# Altium PCB ring_rx_v3_controller.PcbDoc (part 1 of 2)
Units mil, origin at the board's own origin, x right, y up, seen from the top; angles counter-clockwise.
Board outline 1259.38 x 1096.3 mil, 2 copper layers (L1, L2), stack 62.8 mil thick; 124 components, 78 nets, 365 pads, 144 vias.
Unrouted connection lines stored in the file: 28.
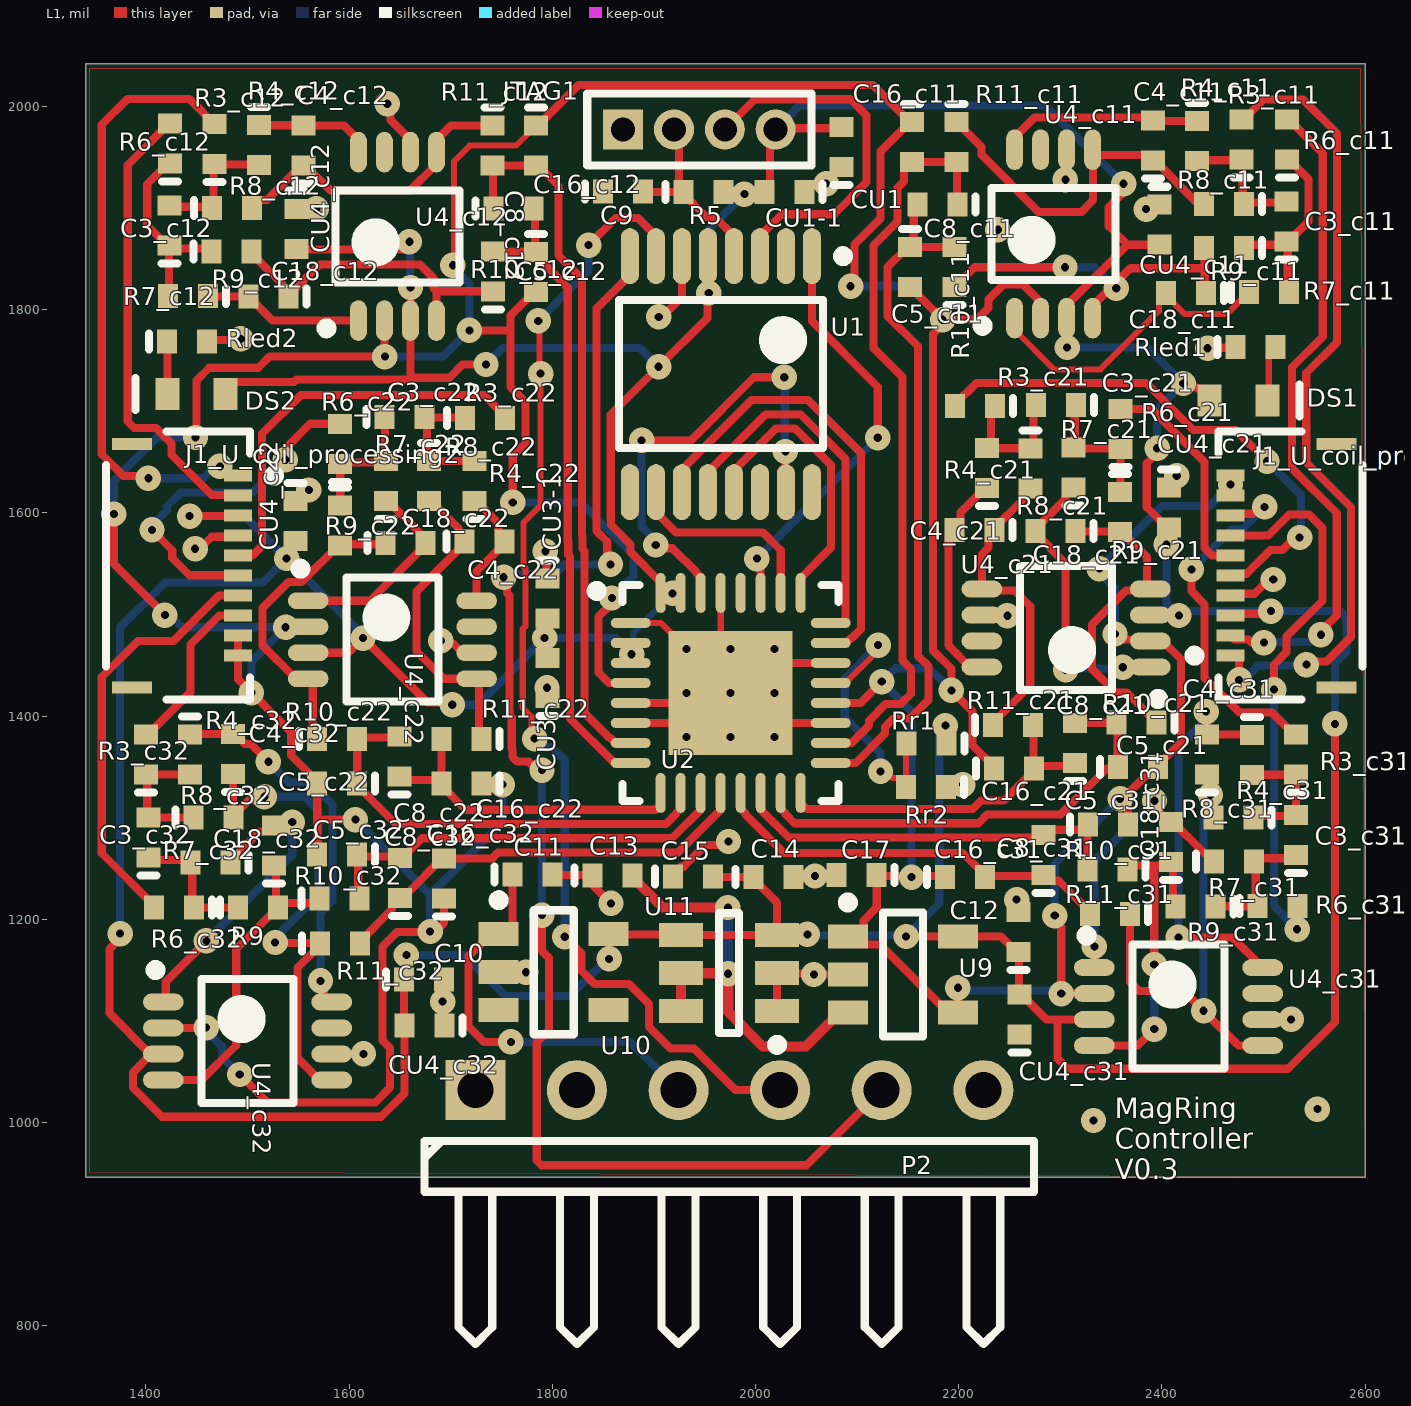
[diagram p0: L1 view]
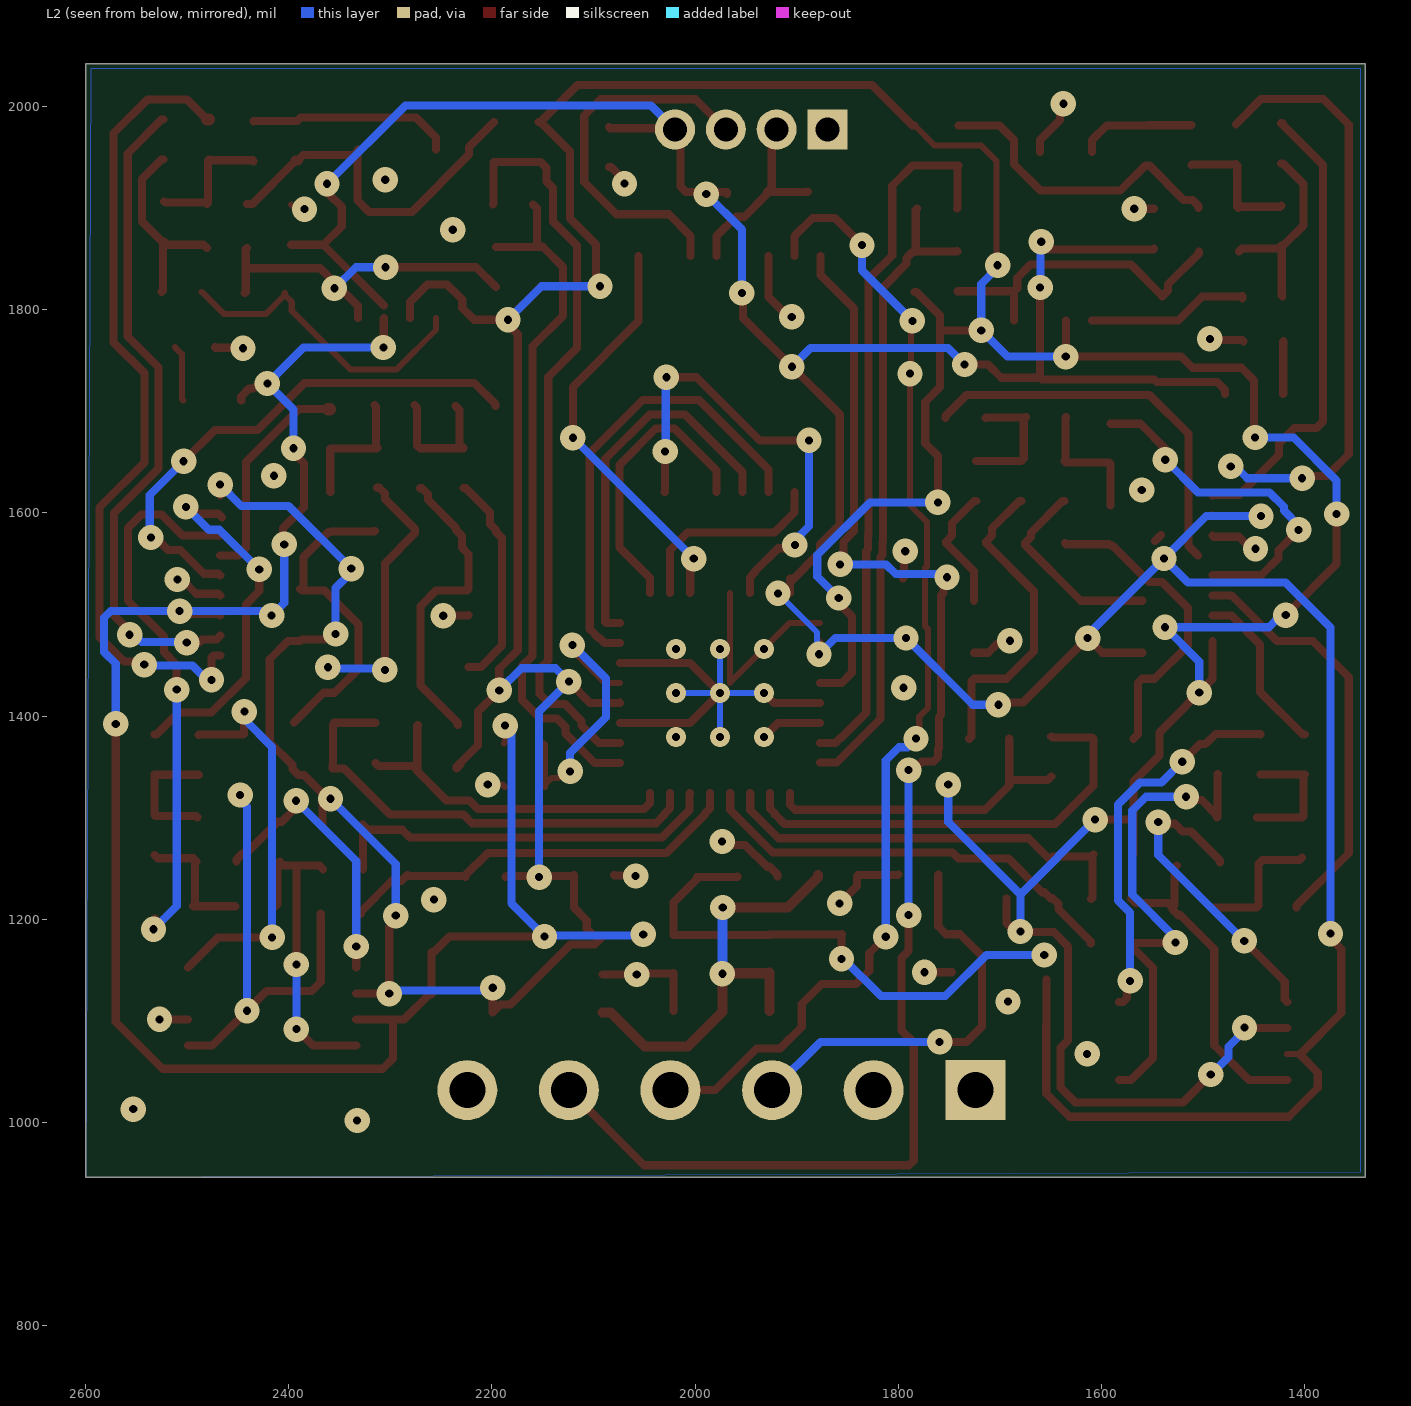
[diagram p1: L2 view, seen from below]

## Layer stack, top to bottom
Top Solder: solder mask 0.1, Solder Resist, Dk 0
L1: signal copper 1.4
Core: dielectric 60, FR-4, Dk 4.6
L2: signal copper 1.4
Bottom Solder: solder mask 0.1, Solder Resist, Dk 0

## Board outline
1340.62,946 2600,946 2600,2042.3 1340.62,2042.3

## Design rules (kind name [scope] priority, off if disabled: settings)
AssemblyTestPointUsage [All] p0: scope1count=1 scope1_0_kind=Board scope1_0_value=Board scope2count=1 scope2_0_kind=Board scope2_0_value=Board commentlength=0
AssemblyTestpoint [All] p0: scope1count=1 scope1_0_kind=Board scope1_0_value=Board scope2count=1 scope2_0_kind=Board scope2_0_value=Board commentlength=0
Clearance "Clearance~Sunstone Circuits" [All] p0: scope1count=1 scope1_0_kind=Board scope1_0_value=Board scope2count=1 scope2_0_kind=Board scope2_0_value=Board commentlength=56 gap=6 // Sunstone Circuits Minimum Clearance Rule (Double Sided)
Clearance "Clearance~Sunstone Circuits" [All] p1: gap=6 ignorepadtopadclearanceinfootprint=FALSE except(0: Arc-Hole Track-Hole SMDPad-Hole THPad-Hole Via-Hole Fill-Hole Poly-Hole Region-Hole Text-Hole) // Sunstone Circuits Minimum Clearance Rule (Double Sided)
ComponentClearance [All] p0: scope1count=1 scope1_0_kind=Board scope1_0_value=Board scope2count=1 scope2_0_kind=Board scope2_0_value=Board commentlength=0 gap=10 collisioncheckmode=3
DiffPairsRouting [All] p0: scope1count=1 scope1_0_kind=Board scope1_0_value=Board scope2count=1 scope2_0_kind=Board scope2_0_value=Board commentlength=0
FabricationTestPointUsage [All] p0: scope1count=1 scope1_0_kind=Board scope1_0_value=Board scope2count=1 scope2_0_kind=Board scope2_0_value=Board commentlength=0 valid=0 allowmultiple=FALSE
FabricationTestpoint [All] p0: scope1count=1 scope1_0_kind=Board scope1_0_value=Board scope2count=1 scope2_0_kind=Board scope2_0_value=Board commentlength=0 side=3 testpointundercomponent=TRUE minsize=40 maxsize=100 preferedsize=60 minholesize=0 maxholesize=40 preferedholesize=32 testpointgrid=1
FanoutControl Fanout_Default [All] p0: scope1count=1 scope1_0_kind=Board scope1_0_value=Board scope2count=1 scope2_0_kind=Board scope2_0_value=Board commentlength=30 // Fanout_Default (Default Rule)
FanoutControl Fanout_Small [All] p0 off: scope1count=1 scope1_0_kind=Board scope1_0_value=Board scope2count=1 scope2_0_kind=Board scope2_0_value=Board commentlength=84 // Protel DXP Scope 1 Expression Was: (CompPinCount < 5)   Fanout_Small (Default Rule)
FanoutControl Fanout_SOIC [All] p0 off: scope1count=1 scope1_0_kind=Board scope1_0_value=Board scope2count=1 scope2_0_kind=Board scope2_0_value=Board commentlength=71 // Protel DXP Scope 1 Expression Was: IsSOIC   Fanout_SOIC (Default Rule)
FanoutControl Fanout_LCC [All] p0 off: scope1count=1 scope1_0_kind=Board scope1_0_value=Board scope2count=1 scope2_0_kind=Board scope2_0_value=Board commentlength=69 // Protel DXP Scope 1 Expression Was: IsLCC   Fanout_LCC (Default Rule)
FanoutControl Fanout_BGA [All] p0 off: scope1count=1 scope1_0_kind=Board scope1_0_value=Board scope2count=1 scope2_0_kind=Board scope2_0_value=Board commentlength=69 // Protel DXP Scope 1 Expression Was: IsBGA   Fanout_BGA (Default Rule)
Height [All] p0: scope1count=1 scope1_0_kind=Board scope1_0_value=Board scope2count=1 scope2_0_kind=Board scope2_0_value=Board commentlength=0
HoleSize TestPointUsage [All] p0: scope1count=1 scope1_0_kind=Board scope1_0_value=Board scope2count=1 scope2_0_kind=Board scope2_0_value=Board commentlength=0 absolutevalues=TRUE maxlimit=100 minlimit=1 maxpercent=80.000 minpercent=20.000
HoleSize Testpoint [All] p0: scope1count=1 scope1_0_kind=Board scope1_0_value=Board scope2count=1 scope2_0_kind=Board scope2_0_value=Board commentlength=0 absolutevalues=TRUE maxlimit=100 minlimit=1 maxpercent=80.000 minpercent=20.000
HoleSize "HoleSize~Sunstone Circuits" [All] p0: scope1count=1 scope1_0_kind=Board scope1_0_value=Board scope2count=1 scope2_0_kind=Board scope2_0_value=Board commentlength=60 absolutevalues=TRUE maxlimit=251 minlimit=8 maxpercent=80.000 minpercent=20.000 // SSC Hole Size Rule For Single Sided & Double Sided Designs.
HoleSize "HoleSize~Sunstone Circuits" [All] p1: absolutevalues=TRUE maxlimit=251 minlimit=8 maxpercent=80.000 minpercent=20.000 // SSC Hole Size Rule For Single Sided & Double Sided Designs.
HoleSize Testpoint [All] p2: absolutevalues=TRUE maxlimit=100 minlimit=1 maxpercent=80.000 minpercent=20.000
HoleSize TestPointUsage [All] p3: absolutevalues=TRUE maxlimit=100 minlimit=1 maxpercent=80.000 minpercent=20.000
HoleToHoleClearance [All] p0: scope1count=1 scope1_0_kind=Board scope1_0_value=Board scope2count=1 scope2_0_kind=Board scope2_0_value=Board commentlength=0
LayerPairs [All] p0: scope1count=1 scope1_0_kind=Board scope1_0_value=Board scope2count=1 scope2_0_kind=Board scope2_0_value=Board commentlength=0 enforce=TRUE
MinimumAnnularRing "MinimumAnnularRing~Sunstone Circuits" [All] p0: scope1count=1 scope1_0_kind=Board scope1_0_value=Board scope2count=1 scope2_0_kind=Board scope2_0_value=Board commentlength=54 minimumring=7 // Sunstone Circuits Minimum Annular Ring (Double Sided)
MinimumAnnularRing "MinimumAnnularRing~Sunstone Circuits" [All] p1: minimumring=7 // Sunstone Circuits Minimum Annular Ring (Double Sided)
MinimumSolderMaskSliver [All] p0: scope1count=1 scope1_0_kind=Board scope1_0_value=Board scope2count=1 scope2_0_kind=Board scope2_0_value=Board commentlength=0
MinimumSolderMaskSliver [All] p1: minsoldermaskwidth=4
NetAntennae [All] p0: scope1count=1 scope1_0_kind=Board scope1_0_value=Board scope2count=1 scope2_0_kind=Board scope2_0_value=Board commentlength=0
PasteMaskExpansion [All] p0: scope1count=1 scope1_0_kind=Board scope1_0_value=Board scope2count=1 scope2_0_kind=Board scope2_0_value=Board commentlength=0 expansion=0
PlaneClearance "PlaneClearance~Sunstone Circuits" [All] p0: scope1count=1 scope1_0_kind=Board scope1_0_value=Board scope2count=1 scope2_0_kind=Board scope2_0_value=Board commentlength=60 clearance=12 // Sunstone Circuits Power Plane Clearance Rule (Double Sided)
PlaneClearance "PlaneClearance~Sunstone Circuits" [All] p1: clearance=12 // Sunstone Circuits Power Plane Clearance Rule (Double Sided)
PlaneConnect "PlaneConnect~Sunstone Circuits" [All] p0: scope1count=1 scope1_0_kind=Board scope1_0_value=Board scope2count=1 scope2_0_kind=Board scope2_0_value=Board commentlength=58 planeconnectstyle=Relief reliefexpansion=10 reliefentries=4 reliefconductorwidth=8 reliefairgap=10 // Sunstone Circuits Power Plane Connect Rule (Double Sided)
PlaneConnect "PlaneConnect~Sunstone Circuits" [All] p1: planeconnectstyle=Relief reliefexpansion=10 reliefentries=4 reliefconductorwidth=8 reliefairgap=10 // Sunstone Circuits Power Plane Connect Rule (Double Sided)
PolygonConnect "PolygonConnect~Sunstone Circuits" [All] p0: scope1count=1 scope1_0_kind=Board scope1_0_value=Board scope2count=1 scope2_0_kind=Board scope2_0_value=Board commentlength=55 connectstyle=Relief reliefconductorwidth=8 reliefentries=4 polygonreliefangle="90 Angle" // Sunstone Circuits Polygon Connect Style (Double Sided)
PolygonConnect "PolygonConnect~Sunstone Circuits" [All] p1: connectstyle=Relief reliefconductorwidth=8 reliefentries=4 polygonreliefangle="90 Angle" airgapwidth=10 // Sunstone Circuits Polygon Connect Style (Double Sided)
RoomDefinition c11 [All] p0: scope1count=1 scope1_0_kind=ComponentClass scope1_0_value=c11 scope2count=1 scope2_0_kind=Board scope2_0_value=Board commentlength=0 region_x1=21112600 region_y1=17402563 region_x2=25454400 region_y2=20072600 confinementstyle=ConfineIn
RoomDefinition c32 [All] p0: scope1count=1 scope1_0_kind=ComponentClass scope1_0_value=c32 scope2count=1 scope2_0_kind=Board scope2_0_value=Board commentlength=0 region_x1=13534600 region_y1=9807700 region_x2=17539700 region_y2=14249900 confinementstyle=ConfineIn
RoomDefinition c31 [All] p0: scope1count=1 scope1_0_kind=ComponentClass scope1_0_value=c31 scope2count=1 scope2_0_kind=Board scope2_0_value=Board commentlength=0 region_x1=21646500 region_y1=10193300 region_x2=25558700 region_y2=14052400 confinementstyle=ConfineIn
RoomDefinition c22 [All] p0: scope1count=1 scope1_0_kind=ComponentClass scope1_0_value=c22 scope2count=1 scope2_0_kind=Board scope2_0_value=Board commentlength=0 region_x1=14981200 region_y1=13113399 region_x2=17802900 region_y2=17173399 confinementstyle=ConfineIn
RoomDefinition c21 [All] p0: scope1count=1 scope1_0_kind=ComponentClass scope1_0_value=c21 scope2count=1 scope2_0_kind=Board scope2_0_value=Board commentlength=0 region_x1=21679100 region_y1=13141200 region_x2=24385951 region_y2=17281200 confinementstyle=ConfineIn
RoomDefinition c12 [All] p0: scope1count=1 scope1_0_kind=ComponentClass scope1_0_value=c12 scope2count=1 scope2_0_kind=Board scope2_0_value=Board commentlength=0 region_x1=14001500 region_y1=17332000 region_x2=18061500 region_y2=20042000 confinementstyle=ConfineIn
RoomDefinition c11 [InComponentClass('c11')] p1: confinementstyle=ConfineIn formatcopy=TRUE lockcomponents=FALSE outline 2111.26,1740.26 2545.44,1740.26 2545.44,2007.26 2111.26,2007.26
RoomDefinition c32 [InComponentClass('c32')] p2: confinementstyle=ConfineIn formatcopy=TRUE lockcomponents=FALSE outline 1353.46,980.77 1753.97,980.77 1753.97,1424.99 1353.46,1424.99
RoomDefinition c31 [InComponentClass('c31')] p3: confinementstyle=ConfineIn formatcopy=TRUE lockcomponents=FALSE outline 2164.65,1019.33 2555.87,1019.33 2555.87,1405.24 2164.65,1405.24
RoomDefinition c22 [InComponentClass('c22')] p4: confinementstyle=ConfineIn formatcopy=TRUE lockcomponents=FALSE outline 1498.12,1717.34 1498.12,1311.34 1780.29,1311.34 1780.29,1717.34
RoomDefinition c21 [InComponentClass('c21')] p5: confinementstyle=ConfineIn formatcopy=TRUE lockcomponents=FALSE outline 2438.6,1314.12 2438.6,1728.12 2167.91,1728.12 2167.91,1314.12
RoomDefinition c12 [InComponentClass('c12')] p6: confinementstyle=ConfineIn formatcopy=TRUE lockcomponents=FALSE outline 1400.15,1733.2 1806.15,1733.2 1806.15,2004.2 1400.15,2004.2
RoutingCorners [All] p0: scope1count=1 scope1_0_kind=Board scope1_0_value=Board scope2count=1 scope2_0_kind=Board scope2_0_value=Board commentlength=0 cornerstyle=45-Degree minsetback=100 maxsetback=100
RoutingLayers [All] p0: scope1count=1 scope1_0_kind=Board scope1_0_value=Board scope2count=1 scope2_0_kind=Board scope2_0_value=Board commentlength=0 top layer=Automatic bottom layer=Automatic
RoutingPriority [All] p0: scope1count=1 scope1_0_kind=Board scope1_0_value=Board scope2count=1 scope2_0_kind=Board scope2_0_value=Board commentlength=0
RoutingTopology [All] p0: scope1count=1 scope1_0_kind=Board scope1_0_value=Board scope2count=1 scope2_0_kind=Board scope2_0_value=Board commentlength=0 topology=Shortest
RoutingVias "RoutingVias~Sunstone Circuits" [All] p0: scope1count=1 scope1_0_kind=Board scope1_0_value=Board scope2count=1 scope2_0_kind=Board scope2_0_value=Board commentlength=51 holewidth=8 width=25 viastyle="Through Hole" minholewidth=8 minwidth=25 maxholewidth=20 maxwidth=40 // Sunstone Circuits Routing Vias Rule (Double Sided)
RoutingVias "RoutingVias~Sunstone Circuits" [All] p1: holewidth=8 width=25 viastyle="Through Hole" minholewidth=8 minwidth=25 maxholewidth=20 maxwidth=40 // Sunstone Circuits Routing Vias Rule (Double Sided)
ShortCircuit "ShortCircuit~Sunstone Circuits" [All] p0: scope1count=1 scope1_0_kind=Board scope1_0_value=Board scope2count=1 scope2_0_kind=Board scope2_0_value=Board commentlength=65 allowed=FALSE // Sunstone Circuits Short Circuit Rule~Do Not Allow (Double Sided)
ShortCircuit "ShortCircuit~Sunstone Circuits" [All] p1: allowed=FALSE // Sunstone Circuits Short Circuit Rule~Do Not Allow (Double Sided)
SilkToBoardRegionClearance [All] p0: scope1count=1 scope1_0_kind=Board scope1_0_value=Board scope2count=1 scope2_0_kind=Board scope2_0_value=Board commentlength=0
SilkToSilkClearance [All] p0: scope1count=1 scope1_0_kind=Board scope1_0_value=Board scope2count=1 scope2_0_kind=Board scope2_0_value=Board commentlength=0
SilkToSolderMaskClearance [All] p0 off: scope1count=1 scope1_0_kind=Board scope1_0_value=Board scope2count=1 scope2_0_kind=Board scope2_0_value=Board commentlength=44 // Protel DXP Scope 1 Expression Was: IsPad
SolderMaskExpansion "SolderMaskExpansion~Sunstone Circuits" [All] p0: scope1count=1 scope1_0_kind=Board scope1_0_value=Board scope2count=1 scope2_0_kind=Board scope2_0_value=Board commentlength=60 expansion=3 // Sunstone Circuits Solder Mask Expansion Rule (Double Sided)
SolderMaskExpansion "SolderMaskExpansion~Sunstone Circuits" [All] p1: expansion=3 // Sunstone Circuits Solder Mask Expansion Rule (Double Sided)
UnRoutedNet [All] p0: scope1count=1 scope1_0_kind=Board scope1_0_value=Board scope2count=1 scope2_0_kind=Board scope2_0_value=Board commentlength=0
UnpouredPolygon [All] p0: scope1count=1 scope1_0_kind=Board scope1_0_value=Board scope2count=1 scope2_0_kind=Board scope2_0_value=Board commentlength=0
ViasUnderSMD "ViasUnderSMD~Sunstone Circuits" [All] p0: scope1count=1 scope1_0_kind=Board scope1_0_value=Board scope2count=1 scope2_0_kind=Board scope2_0_value=Board commentlength=61 allowed=FALSE // Sunstone Circuits Vias Under SMD~Do Not Allow (Double Sided)
ViasUnderSMD "ViasUnderSMD~Sunstone Circuits" [All] p1: allowed=FALSE // Sunstone Circuits Vias Under SMD~Do Not Allow (Double Sided)
Width "Width~Sunstone Circuits" [All] p0: scope1count=1 scope1_0_kind=Board scope1_0_value=Board scope2count=1 scope2_0_kind=Board scope2_0_value=Board commentlength=52 maxlimit=15 minlimit=6 preferedwidth=8 // Sunstone Circuits Minimum Width Rule (Double Sided)
Width "Width~Sunstone Circuits" [All] p1: maxlimit=15 minlimit=6 preferedwidth=8 minimp=50.000000 maximp=50.000000 favimp=50.000000 // Sunstone Circuits Minimum Width Rule (Double Sided)
25 further rules are at their usual default settings.

## Classes and differential pairs
channel class coil_processing: U_coil_processing1 U_coil_processing2
component class U_coil_processing1: J1_U_coil_processing1
component class c31: C3_c31 C4_c31 C5_c31 C8_c31 C16_c31 C18_c31 CU4_c31 R3_c31 R4_c31 R6_c31 R7_c31 R8_c31 R9_c31 R10_c31 R11_c31 U4_c31
component class c21: C3_c21 C4_c21 C5_c21 C8_c21 C16_c21 C18_c21 CU4_c21 R3_c21 R4_c21 R6_c21 R7_c21 R8_c21 R9_c21 R10_c21 R11_c21 U4_c21
component class c11: C3_c11 C4_c11 C5_c11 C8_c11 C16_c11 C18_c11 CU4_c11 R3_c11 R4_c11 R6_c11 R7_c11 R8_c11 R9_c11 R10_c11 R11_c11 U4_c11
component class U_power: C10 C11 C12 C13 C14 C15 C17 DS1 Rled1 U9 U10 U11
component class U_mcu: C9 CU1 CU1-1 CU3 CU3-1 DS2 JTAG1 P2 R5 Rled2 Rr1 Rr2 U1
component class U_coil_processing2: J1_U_coil_processing2 R7
component class c12: C1_c1 C3_c12 C4_c12 C5_c1 C5_c12 C6_c1 C7_c1 C8_c12 C16_c12 C18_c12 Cbp1_c1 CU4_c12 D1_c1 J1_c1 J2_c1 R2_c1 R3_c12 R4_c12 R6_c12 R7_c12 R8_c12 R9_c12 R10_c12 R11_c12 Rbp1_c1 Rbp2_c1 Rbp7_c1 Rxor2_c1 U2_c1 U4_c12
component class c22: C1_c2 C3_c22 C4_c22 C5_c2 C5_c22 C6_c2 C7_c2 C8_c22 C16_c22 C18_c22 Cbp1_c2 CU4_c22 D1_c2 J1_c2 J2_c2 R2_c2 R3_c22 R4_c22 R6_c22 R7_c22 R8_c22 R9_c22 R10_c22 R11_c22 Rbp1_c2 Rbp2_c2 Rbp7_c2 Rxor2_c2 U2_c2 U4_c22
component class c32: C1_c3 C3_c32 C4_c32 C5_c3 C5_c32 C6_c3 C7_c3 C8_c32 C16_c32 C18_c32 Cbp1_c3 CU4_c32 D1_c3 J2_c3 J3_c3 R2_c3 R3_c32 R4_c32 R6_c32 R7_c32 R8_c32 R9 R10_c32 R11_c32 Rbp1_c3 Rbp2_c3 Rbp7_c3 Rxor2_c3 U2_c3 U4_c32
channel class coils: c12 c22 c32

## Components (designator, comment, footprint, x,y, rotation, side; value= is the part's Value field where it differs from the comment)
C3_c11 "Cap" 0402 2522.6,1886.82 r90 top (schematic designator C3)
C3_c12 "Cap" 0402 1423.17,1882.67 r90 top (schematic designator C3)
C3_c21 "Cap" 0402 2295.91,1706.19 r180 top (schematic designator C3)
C3_c22 "Cap" 0402 1654.47,1694.34 r0 top (schematic designator C3)
C3_c31 "Cap" 0402 2532.13,1282.93 r90 top (schematic designator C3)
C3_c32 "Cap" 0402 1402.7,1280.61 r90 top (schematic designator C3)
C4_c11 "Cap" 0402 2391.13,1966.44 r90 top (schematic designator C4)
C4_c12 "Cap" 0402 1554.93,1961.53 r90 top (schematic designator C4)
C4_c21 "Cap" 0402 2215.6,1583.12 r180 top (schematic designator C4)
C4_c22 "Cap" 0402 1733.2,1571.86 r0 top (schematic designator C4)
C4_c31 "Cap" 0402 2444.56,1362.38 r90 top (schematic designator C4)
C4_c32 "Cap" 0402 1485.6,1362.73 r90 top (schematic designator C4)
C5_c11 "Cap" 0402 2151.95,1842.24 r270 top (schematic designator C5)
C5_c12 "Cap" 0402 1784.07,1837.04 r270 top (schematic designator C5)
C5_c21 "Cap" 0402 2376.72,1349.87 r0 top (schematic designator C5)
C5_c22 "Cap" 0402 1588.33,1333.71 r180 top (schematic designator C5)
C5_c31 "Cap" 0402 2346.89,1293.26 r0 top (schematic designator C5)
C5_c32 "Cap" 0402 1588.35,1263.88 r180 top (schematic designator C5)
C8_c11 "Cap" 0402 2179.24,1903.68 r180 top (schematic designator C8)
C8_c12 "Cap" 0402 1761.97,1899.52 r0 top (schematic designator C8)
C8_c21 "Cap" 0402 2314.46,1373.38 r90 top (schematic designator C8)
C8_c22 "Cap" 0402 1649.52,1360.39 r90 top (schematic designator C8)
C8_c31 "Cap" 0402 2283.26,1263.45 r90 top (schematic designator C8)
C8_c32 "Cap" 0402 1650.25,1240.43 r90 top (schematic designator C8)
C9 "Cap" 0402 1869.47,1916.12 r0 top
C10 "Cap" 0402 1673.69,1140.58 r0 top
C11 "" 0402 1780.39,1243.97 r0 top
C12 "Cap" 0402 2258.93,1187.52 r90 top
C13 "Cap" 0402 1859.31,1243.31 r0 top
C14 "Cap" 0402 2017.72,1241.65 r0 top
C15 "Cap" 0402 1938.56,1241.98 r0 top
C16_c11 "Cap" 0402 2154.11,1965.11 r270 top (schematic designator C16)
C16_c12 "Cap" 0402 1784.08,1961.67 r270 top (schematic designator C16)
C16_c21 "Cap" 0402 2254.36,1348.32 r0 top (schematic designator C16)
C16_c22 "Cap" 0402 1710.52,1333.71 r180 top (schematic designator C16)
C16_c31 "Cap" 0402 2206.16,1241.46 r0 top (schematic designator C16)
C16_c32 "Cap" 0402 1693.57,1240.04 r90 top (schematic designator C16)
C17 "Cap" 0402 2099.63,1243.44 r180 top
C18_c11 "Cap" 0402 2423.57,1816.46 r180 top (schematic designator C18)
C18_c12 "Cap" 0402 1520.56,1812.92 r180 top (schematic designator C18)
C18_c21 "Cap" 0402 2295.22,1582.12 r180 top (schematic designator C18)
C18_c22 "Cap" 0402 1655.6,1570.34 r0 top (schematic designator C18)
C18_c31 "Cap" 0402 2408.9,1276.28 r90 top (schematic designator C18)
C18_c32 "Cap" 0402 1525.99,1272.62 r90 top (schematic designator C18)
CU1 "Cap" 0402 2084.8,1960.09 r90 top
CU1-1 "Cap" 0402 2028.56,1915.76 r180 top
CU3 "Cap" 0402 1795.17,1437.71 r90 top
CU3-1 "Cap" 0402 1795.51,1515.93 r270 top
CU4_c11 "Cap" 0402 2397.5,1883.63 r270 top (schematic designator CU4)
CU4_c12 "Cap" 0402 1548.19,1879.64 r270 top (schematic designator CU4)
CU4_c21 "Cap" 0402 2406.91,1605.43 r270 top (schematic designator CU4)
CU4_c22 "Cap" 0402 1547.29,1592.03 r270 top (schematic designator CU4)
CU4_c31 "Cap" 0402 2259.74,1106.38 r90 top (schematic designator CU4)
CU4_c32 "Cap" 0402 1674.09,1095.49 r180 top (schematic designator CU4)
DS1 "TLMS1100-GS08" VISH-TLMX1100_V 2475.28,1710.67 r0 top
DS2 "TLMS1100-GS08" VISH-TLMX1100_V 1449.8,1717.15 r180 top
J1_U_coil_processing1 "503480-1000" MOLX-503480-1000 2519.61,1548.08 r90 top (schematic designator J1)
J1_U_coil_processing2 "503480-1000" MOLX-503480-1000 1438.48,1548.08 r270 top (schematic designator J1)
JTAG1 "MHDR1X4" MHDR1X4 1869.82,1977.44 r0 top
P2 "Header 6H" HDR1X6H 1724.29,1031.85 r0 top
R3_c11 "Res" 0402 2478.58,1967.61 r90 top (schematic designator R3)
R3_c12 "Res" 0402 1467.65,1962.87 r90 top (schematic designator R3)
R3_c21 "Res" 0402 2216.22,1705.12 r180 top (schematic designator R3)
R3_c22 "Res" 0402 1733.97,1693.34 r0 top (schematic designator R3)
R3_c31 "Res" 0402 2532.13,1362.13 r90 top (schematic designator R3)
R3_c32 "Res" 0402 1400,1362.13 r90 top (schematic designator R3)
R4_c11 "Res" 0402 2434.57,1965.87 r270 top (schematic designator R4)
R4_c12 "Res" 0402 1511.46,1962.2 r270 top (schematic designator R4)
R4_c21 "Res" 0402 2227.91,1644.12 r90 top (schematic designator R4)
R4_c22 "Res" 0402 1723.29,1631.34 r90 top (schematic designator R4)
R4_c31 "Res" 0402 2488.59,1361.89 r270 top (schematic designator R4)
R4_c32 "Res" 0402 1443.43,1362.36 r270 top (schematic designator R4)
R5 "Res" 0402 1948.99,1915.76 r0 top
R6_c11 "Res" 0402 2523.14,1967.48 r90 top (schematic designator R6)
R6_c12 "Res" 0402 1423.51,1963.55 r90 top (schematic designator R6)
R6_c21 "Res" 0402 2359.35,1682.43 r90 top (schematic designator R6)
R6_c22 "Res" 0402 1591.29,1668.02 r90 top (schematic designator R6)
R6_c31 "Res" 0402 2513.67,1213.07 r0 top (schematic designator R6)
R6_c32 "Res" 0402 1427.61,1211.77 r180 top (schematic designator R6)
R7_c11 "Res" 0402 2505.51,1817.32 r0 top (schematic designator R7)
R7_c12 "Res" 0402 1441.7,1813.25 r180 top (schematic designator R7)
R7_c21 "Res" 0402 2312.91,1644.49 r90 top (schematic designator R7)
R7_c22 "Res" 0402 1636.29,1631.34 r90 top (schematic designator R7)
R7_c31 "Res" 0402 2471.12,1256.86 r0 top (schematic designator R7)
R7_c32 "Res" 0402 1463.64,1256.04 r180 top (schematic designator R7)
R8_c11 "Res" 0402 2460.93,1904.2 r180 top (schematic designator R8)
R8_c12 "Res" 0402 1484.97,1900.2 r0 top (schematic designator R8)
R8_c21 "Res" 0402 2270.91,1643.92 r270 top (schematic designator R8)
R8_c22 "Res" 0402 1678.9,1631.34 r270 top (schematic designator R8)
R8_c31 "Res" 0402 2470.39,1300.4 r180 top (schematic designator R8)
R8_c32 "Res" 0402 1466.59,1300.34 r0 top (schematic designator R8)
R9 "Res" 0402 1510.59,1211.77 r0 top
R9_c11 "Res" 0402 2460.93,1860.76 r180 top (schematic designator R9)
R9_c12 "Res" 0402 1484.31,1857.4 r0 top (schematic designator R9)
R9_c21 "Res" 0402 2358.91,1600.81 r270 top (schematic designator R9)
R9_c22 "Res" 0402 1591.29,1587.65 r270 top (schematic designator R9)
R9_c31 "Res" 0402 2432.99,1212.58 r180 top (schematic designator R9)
R10_c11 "Res" 0402 2196.04,1841.88 r90 top (schematic designator R10)
R10_c12 "Res" 0402 1741.62,1837.85 r90 top (schematic designator R10)
R10_c21 "Res" 0402 2375.18,1393.79 r180 top (schematic designator R10)
R10_c22 "Res" 0402 1588.33,1377.71 r0 top (schematic designator R10)
R10_c31 "Res" 0402 2346.41,1249.23 r180 top (schematic designator R10)
R10_c32 "Res" 0402 1590.38,1220.25 r0 top (schematic designator R10)
R11_c11 "Res" 0402 2197.84,1965.11 r270 top (schematic designator R11)
R11_c12 "Res" 0402 1740.94,1961.67 r270 top (schematic designator R11)
R11_c21 "Res" 0402 2253.27,1391.38 r0 top (schematic designator R11)
R11_c22 "Res" 0402 1710.52,1377.71 r180 top (schematic designator R11)
R11_c31 "Res" 0402 2348.79,1205.41 r180 top (schematic designator R11)
R11_c32 "Res" 0402 1590.89,1176.1 r0 top (schematic designator R11)
Rled1 "Res" 0402 2492.34,1763.1 r0 top
Rled2 "Res" 0402 1440.71,1768.94 r0 top
Rr1 "Res" 0402 2168.49,1373.14 r180 top
Rr2 "Res" 0402 2167.66,1330.38 r180 top
U1 "MSP430FR2422" TSOP65P640X120-16N 1966.03,1736.56 r270 top
U2 "AD7265BCPZ-REEL7" CP-32-2_M 1975.65,1422.83 r0 top
U4_c11 "LTC6363" "TSOP65P490X110-8N - LTC6363" 2293.45,1874.66 r90 top (schematic designator U4)
U4_c12 "LTC6363" "TSOP65P490X110-8N - LTC6363" 1647.6,1872.23 r90 top (schematic designator U4)
U4_c21 "LTC6363" "TSOP65P490X110-8N - LTC6363" 2305.8,1486.73 r180 top (schematic designator U4)
U4_c22 "LTC6363" "TSOP65P490X110-8N - LTC6363" 1642.66,1475.19 r0 top (schematic designator U4)
U4_c31 "LTC6363" "TSOP65P490X110-8N - LTC6363" 2416.42,1114.11 r0 top (schematic designator U4)
U4_c32 "LTC6363" "TSOP65P490X110-8N - LTC6363" 1500.06,1080.2 r0 top (schematic designator U4)
U9 "ADA4084-1ARJZ-R7" SOT95P280X145-5N 2145.08,1145.7 r0 top
U10 "TPS70933" SOT95P280X145-5N 1801.44,1147.91 r0 top
U11 "ADR3412ARJZ-R2" ADI-RJ-6_N 1973.99,1147.33 r180 top

## Footprints (in the part's own frame and the unit in brackets; to place one, negate y for a bottom-side part, rotate by r counter-clockwise, add the part's x,y. Pads: shape width x height; smd on the part's side, far side on the other; paste and mask are expansions set on the pad)
0402 [mm] "Surface Mount; Body 1 x 0.5 mm (LxW typ)"
  rect 0.5x0.6 smd: 1(-0.5,0) 2(0.5,0)
  silkscreen extent -0.95,-0.2 -0.95,0.2
ADI-RJ-6_N [mm] "SOT23, 6-Leads, Body 2.9x1.6mm, Pitch 0.95mm, IPC Medium Density"
  rect 1.1x0.6 smd: 1(-1.2,0.95) 2(-1.2,0) 3(-1.2,-0.95) 4(1.2,-0.95) 5(1.2,0) 6(1.2,0.95)
  silkscreen extent -1.33,-1.5 0.25,1.92
CP-32-2_M [mm] "QFN, 32-Leads, Body 5x5mm, Pitch 0.5mm, Thermal Pad 3.1x3.1mm, IPC Low Density"
  oval 1x0.25 smd: 1(-2.5,1.75) 2(-2.5,1.25) 3(-2.5,0.75) 4(-2.5,0.25) 5(-2.5,-0.25) 6(-2.5,-0.75) 7(-2.5,-1.25) 8(-2.5,-1.75) 17(2.5,-1.75) 18(2.5,-1.25) 19(2.5,-0.75) 20(2.5,-0.25) 21(2.5,0.25) 22(2.5,0.75) 23(2.5,1.25) 24(2.5,1.75)
  oval 0.25x1 smd: 9(-1.75,-2.5) 10(-1.25,-2.5) 11(-0.75,-2.5) 12(-0.25,-2.5) 13(0.25,-2.5) 14(0.75,-2.5) 15(1.25,-2.5) 16(1.75,-2.5) 25(1.75,2.5) 26(1.25,2.5) 27(0.75,2.5) 28(0.25,2.5) 29(-0.25,2.5) 30(-0.75,2.5) 31(-1.25,2.5) 32(-1.75,2.5)
  rect 3.1x3.1 smd: 33(0,0)
  silkscreen extent -3.47,-2.7 2.7,2.7
HDR1X6H [mm] "Connector; Header; 6 Position; Right Angle"
  rect 1.5x1.5 hole 0.9: 1(0,0)
  round 1.5 hole 0.9: 2(2.54,0) 3(5.08,0) 4(7.62,0) 5(10.16,0) 6(12.7,0)
  silkscreen extent -1.27,-6.35 13.97,-1.27
MHDR1X4 [mm] "Connector; Header; 4 Position"
  rect 1x1 hole 0.6: 1(0,0)
  round 1 hole 0.6: 2(1.27,0) 3(2.54,0) 4(3.81,0)
  silkscreen extent -0.9,-0.9 4.71,0.9
MOLX-503480-1000 [mm] "FPC Connector, 10-Leads, Right Angle, Pitch 0.5 mm, Mated Height 1.0 mm, SMT"
  rect 0.3x0.7 smd: 1(-2.25,1.325) 2(-1.75,1.325) 3(-1.25,1.325) 4(-0.75,1.325) 5(-0.25,1.325) 6(0.25,1.325) 7(0.75,1.325) 8(1.25,1.325) 9(1.75,1.325) 10(2.25,1.325)
  rect 0.3x1 smd: MP1(-3.04,-1.325) MP2(3.04,-1.325)
  silkscreen extent -3.35,-1.98 3.35,2.35
SOT95P280X145-5N [mm] "SOT23, 5-Leads, Body 2.90x2.80mm, Pitch 0.95mm, IPC Medium Density"
  rect 1x0.6 smd: 1(-1.375,0.95) 2(-1.375,0) 3(-1.375,-0.95) 4(1.375,-0.95) 5(1.375,0.95)
  silkscreen extent -1.5,-1.55 0.5,1.92
"TSOP65P490X110-8N - LTC6363" [mm] "TSOP, 8-Leads, Body 3.00x3.00mm, Pitch 0.65mm, IPC Medium Density"
  oval 1.016x0.42 smd: 1(-2.105,0.975) 2(-2.105,0.325) 3(-2.105,-0.325) 4(-2.105,-0.975) 5(2.105,-0.975) 6(2.105,-0.325) 7(2.105,0.325) 8(2.105,0.975)
  silkscreen extent -2.42,-1.55 1.15,1.9
TSOP65P640X120-16N [mm] "TSOP, 16-Leads, Body 5.00x4.40mm, Pitch 0.65mm, IPC Medium Density"
  oval 1.4x0.45 smd: 1(-2.95,2.275) 2(-2.95,1.625) 3(-2.95,0.975) 4(-2.95,0.325) 5(-2.95,-0.325) 6(-2.95,-0.975) 7(-2.95,-1.625) 8(-2.95,-2.275) 9(2.95,-2.275) 10(2.95,-1.625) 11(2.95,-0.975) 12(2.95,-0.325) 13(2.95,0.325) 14(2.95,0.975) 15(2.95,1.625) 16(2.95,2.275)
  silkscreen extent -3.07,-2.55 1.85,3.17
VISH-TLMX1100_V [mm] "SMD, 2-Leads, Body 1.6x0.8mm"
  rect 0.6x0.8 smd: 1(-0.725,0) 2(0.725,0)
  silkscreen extent 1.53,-0.4 1.53,0.4

## Part data
C3_c11 C3_c12 C3_c21 C3_c22 C3_c31 C3_c32 C4_c11 C4_c12 C4_c21 C4_c22 C4_c31 C4_c32 C5_c11 C5_c12 C5_c21 C5_c22 C5_c31 C5_c32 C8_c11 C8_c12 C8_c21 C8_c22 C8_c31 C8_c32 C9 C10 C12 C13 C14 C15 C16_c11 C16_c12 C16_c21 C16_c22 C16_c31 C16_c32 C17 C18_c11 C18_c12 C18_c21 C18_c22 C18_c31 C18_c32 CU1 CU1-1 CU3 CU3-1 CU4_c11 CU4_c12 CU4_c21 CU4_c22 CU4_c31 CU4_c32: "Ceramic Capacitor (Surface Mount)"
C11: library part Cap, "Ceramic Capacitor (Surface Mount)"
DS1 DS2: library part CMP-1666-00027-1, "LED, RED, 2.1 V, -40 to 100 degC, 2-Pin SMD (0603), RoHS, Tape and Reel"
J1_U_coil_processing1 J1_U_coil_processing2: library part CMP-1241-00115-1, "0.5 mm Pitch Easy-On(TM) BackFlip(TM) Type FPC Connector, 1.0 mm Mated Height, Right Angle, SMT, Dual Contact, 10 Circuits, -40 to 85 degC, ELV and RoHS Compliant, Tape and Reel"
JTAG1: "Header, 4-Pin"
P2: "Header, 6-Pin, Right Angle"
R3_c11 R3_c12 R3_c21 R3_c22 R3_c31 R3_c32 R4_c11 R4_c12 R4_c21 R4_c22 R4_c31 R4_c32 R5 R6_c11 R6_c12 R6_c21 R6_c22 R6_c31 R6_c32 R7_c11 R7_c12 R7_c21 R7_c22 R7_c31 R7_c32 R8_c11 R8_c12 R8_c21 R8_c22 R8_c31 R8_c32 R9 R9_c11 R9_c12 R9_c21 R9_c22 R9_c31 R10_c11 R10_c12 R10_c21 R10_c22 R10_c31 R10_c32 R11_c11 R11_c12 R11_c21 R11_c22 R11_c31 R11_c32 Rled1 Rled2 Rr1 Rr2: "Chip Resistor (Surface Mount)"
U1: "MSP430FR2422 Mixed-Signal Microcontroller"
U2: library part CMP-0313-00283-2, "1Dual 12-Bit SAR Analog-to-Digital Converter with Serial, SPI Interface, 1MSPS, -40 to +125 degC, CP-32-2, Pb-Free, Reel"
U9: library part ADA4622-1ARJZ, "30 V, 8 MHz, Low Bias Current, / Single-Supply, RRO, Precision Op Amps"
U10: "3.3V Ultra low power Voltage Regulator"
U11: library part CMP-0784-00363-1, "Micropower, High Accuracy Voltage Reference, 1.2 V Output, 2.3 to 5.5 V Supply, Industrial, 6-pin SOT23 (RJ-6), Reel"

## Via types
v1: diameter 25, hole 8, L1 to L2, 135 vias
v2: diameter 19.68, hole 7.87, L1 to L2, 9 vias

## Nets (pads, with @x,y where several pads share a name; then routed paths per layer and width w, separated by ;. In a path a pad name is that pad's centre, name@x,y a point inside that pad or via, vN(x,y) a via of type N, cw(c..) or ccw(c..) an arc to the next point about the centre after c; other vN are vias at no path point)
A0: U1.13 U2.25 | length 287.2
  L1 w8: U1.13@1978.82,1620.42 1978.82,1641.64 2020.16,1682.98 2038.8,1682.98 2074.45,1647.33 2074.45,1565.92 2044.55,1536.02 U2.25@2044.55,1521.26
A1: U1.12 U2.24 | length 372
  L1 w8: U1.12@1953.23,1620.42 1953.23,1640.2 2010.01,1696.98 2044.6,1696.98 2088.45,1653.13 2088.45,1492.58 2087.6,1491.73 U2.24@2074.08,1491.73
A2: U1.11 U2.23 | length 456.8
  L1 w8: U1.11@1927.64,1620.42 1927.64,1642.62 1996,1710.98 2051.57,1710.98 2103.76,1658.79 2103.76,1485.55 2095.02,1476.81 2094.1,1476.81 2089.34,1472.05 U2.23@2074.08,1472.05
ch1+_U_coil_processing1: J1_U_coil_processing1.1 R3_c11.2 | length 801.3
  L1 w8: J1_U_coil_processing1.1@2467.44,1459.5 2474.08,1459.5 2475.98,1457.59 v1(2475.98,1435.66) ; R3_c11.2@2480.55,1987.3 2500.26,2007.01 2539.09,2007.01 2572.41,1973.69 2572.41,1767.89 2542.09,1737.57 2542.09,1649.65 2586.13,1605.61 2586.13,1477.87 2562.13,1453.87 2545.49,1453.87 v1(2542.24,1450.62)
  L1 w12: R3_c11.2@2478.58,1987.3 R3_c11.2@2480.55,1987.3
  L2 w8: v1(2475.98,1435.66) 2480.58,1435.66 2494.78,1449.86 2541.49,1449.86 v1(2542.24,1450.62)
ch1+_U_coil_processing2: J1_U_coil_processing2.1 R3_c12.2 | length 586.9
  L1 w8: v1(1402.52,1634.1) 1400.29,1636.33 1378.02,1636.33 1356.63,1657.72 1356.63,1982.17 1381.77,2007.32 1442.89,2007.32 R3_c12.2@1467.65,1982.56
  L2 w8: v1(1402.52,1634.1) 1456.53,1634.1 1468.2,1645.77 v1(1472.8,1645.77)
ch1-_U_coil_processing1: J1_U_coil_processing1.2 R6_c11.2 | length 655.2
  L1 w8: J1_U_coil_processing1.2@2467.44,1479.18 2471.22,1475.4 2485.37,1475.4 2488.41,1472.36 v1(2500.35,1472.36) ; R6_c11.2@2523.14,1987.17 2525.11,1987.17 2558.41,1953.86 2558.41,1773.69 2528.09,1743.37 2528.09,1643.85 2572.13,1599.81 2572.13,1499.22 2556.57,1483.65 v1(2556.57,1480.13)
  L2 w8: v1(2500.35,1472.36) 2501.1,1473.12 2544.96,1473.12 2551.97,1480.13 v1(2556.57,1480.13)
ch1-_U_coil_processing2: J1_U_coil_processing2.2 R6_c12.2 | length 457.8
  L1 w8: R6_c12.2@1421.54,1983.24 R6_c12.2@1422.86,1983.24 ; R6_c12.2@1423.19,1983.56 R6_c12.2@1422.86,1983.24 ; R6_c12.2@1423.51,1983.24 R6_c12.2@1422.86,1983.24 ; J1_U_coil_processing2.2@1490.65,1616.98 1489.86,1617.77 1464.87,1617.77 1425.36,1657.27 1425.36,1668.45 1410.14,1683.67 1388.58,1683.67 1382.15,1690.1 1382.15,1942.52 R6_c12.2@1422.86,1983.24
ch2+_U_coil_processing1: J1_U_coil_processing1.5 R3_c21.2 | length 522.7
  L1 w8: R3_c21.2@2196.54,1705.12 2196.54,1707.09 2217.45,1728 2384.66,1728 2430.9,1681.76 2472.57,1681.76 v1(2503.51,1650.82) ; J1_U_coil_processing1.5@2467.44,1538.24 2469.35,1540.14 2483.49,1540.14 2506.77,1563.42 2518.68,1563.42 2531.03,1575.78 v1(2535.63,1575.78)
  L2 w8: v1(2503.51,1650.82) 2536.84,1617.49 2536.84,1576.98 v1(2535.63,1575.78)
ch2+_U_coil_processing2: J1_U_coil_processing2.5 R3_c22.2 | length 389.2
  L1 w8: 1505.14,1558.24 1514.42,1567.53 1514.42,1677.89 1552.68,1716.15 1732.82,1716.15 1753.66,1695.31 R3_c22.2@1753.66,1693.34
ch2-_U_coil_processing1: J1_U_coil_processing1.6 R6_c21.2 | length 217.5
  L1 w8: R6_c21.2@2361.32,1702.12 2389.84,1702.12 2441.89,1650.08 2441.89,1565.31 2449.27,1557.92 J1_U_coil_processing1.6@2467.44,1557.92
  L1 w12: R6_c21.2@2359.35,1702.12 R6_c21.2@2361.32,1702.12
ch2-_U_coil_processing2: J1_U_coil_processing2.6 R6_c22.2 | length 348.2
  L1 w8: v1(1406.02,1583.26) 1425.99,1563.29 1425.99,1555.44 1442.84,1538.59 J1_U_coil_processing2.6@1490.65,1538.59 ; v1(1537.3,1652.33) 1536.42,1653.21 1536.42,1662.39 1561.74,1687.71 R6_c22.2@1591.29,1687.71
  L2 w8: v1(1406.02,1583.26) 1406.02,1587.86 1420.58,1602.42 1420.58,1606.1 1434.58,1620.1 1505.07,1620.1 v1(1537.3,1652.33)
ch3+_U_coil_processing1: J1_U_coil_processing1.8 R3_c31.2 | length 362.9
  L1 w8: v1(2429.02,1544.37) 2429.02,1522.96 2442.14,1509.85 2442.14,1437.69 2476.27,1403.55 2508.43,1403.55 2530.16,1381.82 R3_c31.2@2532.13,1381.82 ; J1_U_coil_processing1.8@2465.54,1595.39 J1_U_coil_processing1.8@2467.44,1597.29 2469.35,1599.2 2489.86,1599.2 2496.59,1605.93 v1(2501.19,1605.93)
  L2 w8: v1(2429.02,1544.37) 2468.02,1583.37 2478.63,1583.37 v1(2501.19,1605.93)
ch3+_U_coil_processing2: J1_U_coil_processing2.8 R3_c32.2 | length 166.6
  L1 w8: R3_c32.2@1400,1381.82 1401.97,1381.82 1443.9,1423.75 1443.9,1470.59 1472.18,1498.87 J1_U_coil_processing2.8@1490.65,1498.87
ch3-_U_coil_processing1: J1_U_coil_processing1.7 R6_c31.2 | length 540.2
  L1 w8: J1_U_coil_processing1.7@2467.44,1577.61 2504.69,1577.61 2525.36,1598.28 2544.95,1598.28 2558.13,1585.09 2558.13,1513.51 2522.85,1478.23 2522.85,1463.04 2510.35,1450.55 2510.35,1426.19 v1(2510.21,1426.05) ; v1@2531.76,1200.96 2531.76,1191.55 v1(2533.08,1190.23)
  L2 w8: v1(2510.21,1426.05) 2510.21,1213.1 v1(2533.08,1190.23)
ch3-_U_coil_processing2: J1_U_coil_processing2.7 R6_c32.2 | length 415.1
  L1 w8: R6_c32.2@1407.92,1211.77 1407.92,1213.74 1356.63,1265.03 1356.63,1438.44 1392.12,1473.94 1427.26,1473.94 1471.87,1518.55 J1_U_coil_processing2.7@1490.65,1518.55
CLK: U1.1 U2.27 | length 409.2
  L1 w8: v1(2001.33,1555) 2001.33,1550.4 2004.83,1546.9 2004.83,1521.61 U2.27@2005.18,1521.26 ; U1.1@2055.59,1852.7 2055.59,1788.81 2120.35,1724.05 v1(2120.35,1674.02)
  L2 w8: v1(2001.33,1555) v1(2120.35,1674.02)
CS: U1.10 U2.26 | length 200.1
  L1 w8: U1.10@1902.05,1620.42 1902.05,1600.64 1921.87,1580.82 2007.33,1580.82 2024.87,1563.28 U2.26@2024.87,1521.26